# EAGLE board Display (EAGLE 8.6.2)
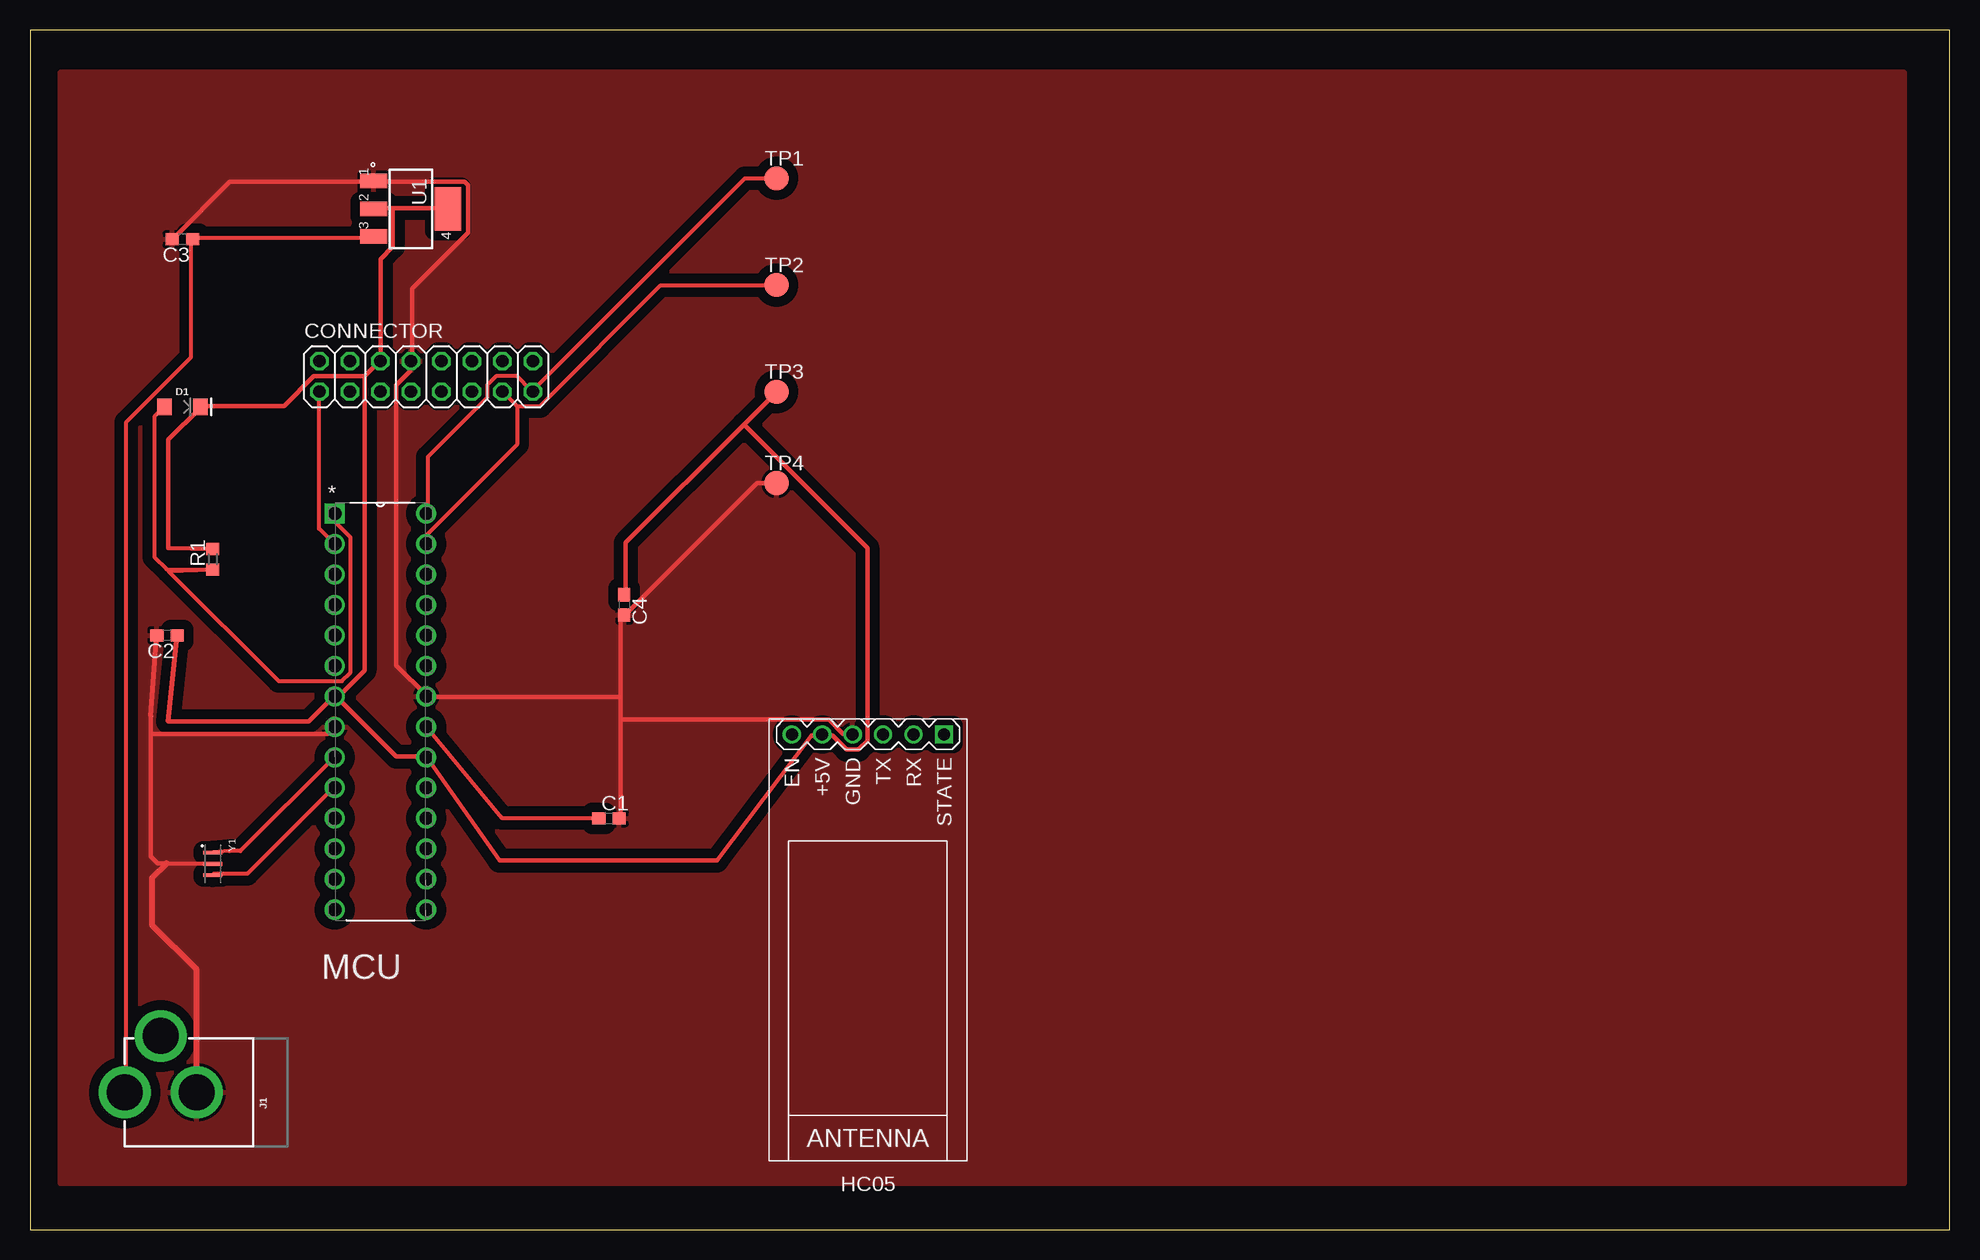
[diagram p0: board, top side]
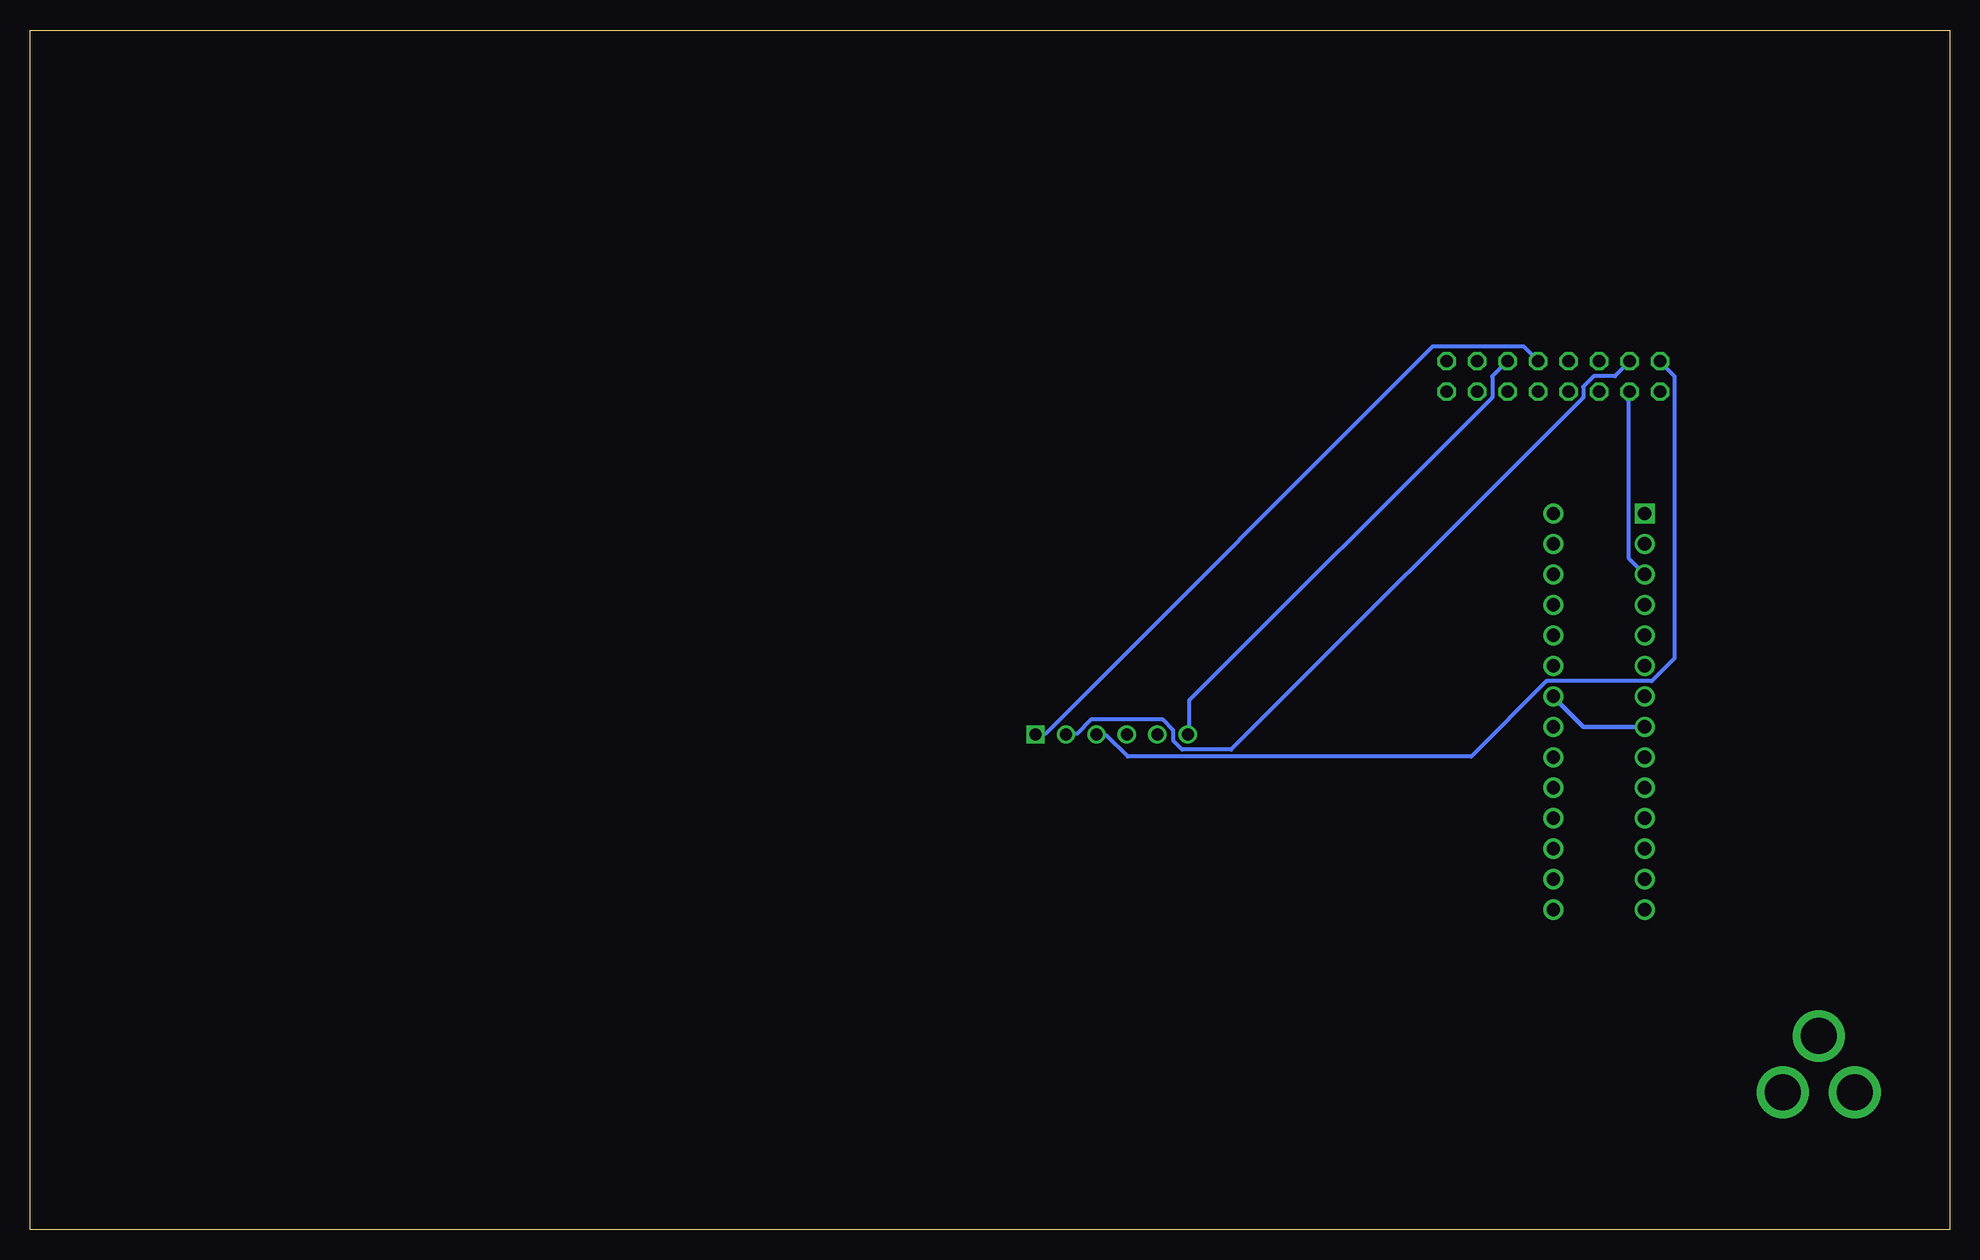
[diagram p1: board, bottom side, seen from below]

Size 160 x 100 mm. Coordinates in mm from the lower left corner, seen from the top.
Outline: 0,0 160,0 160,100 0,100 0,0
Copper layers (1*16): Top 0.035mm / dielectric 1.5mm / Bottom 0.035mm
Design rules "default": minimum track width 6mil, minimum drill 0.35mm, track to track 6mil, track to pad 6mil, pad to pad 6mil, via to via 6mil, smd to smd 6mil, copper to edge 40mil, drill to drill 6mil, minimum pad ring 10mil, minimum via ring 8mil, stop-mask expansion 4mil, vias tented up to drill 0mil, thermal gap 10mil
Net classes: 0 default: width 0.33 mm, drill 0.559 mm, clearance 0.254 mm; 1 ground: width 0.381 mm, drill 0.254 mm, clearance 0.254 mm; 2 5V: width 0.381 mm, drill 0.254 mm, clearance 0.254 mm

## Footprints (pad centres in the part's own frame; a part is rotated, then mirrored left to right if it is on the bottom)
C0603 = smd 1.1 x 1: 1 -0.85,0; 2 0.85,0
2X08 = drill 1.016 octagon: 1 -8.89,-1.27; 2 -8.89,1.27; 3 -6.35,-1.27; 4 -6.35,1.27; 5 -3.81,-1.27; 6 -3.81,1.27; 7 -1.27,-1.27; 8 -1.27,1.27; 9 1.27,-1.27; 10 1.27,1.27; 11 3.81,-1.27; 12 3.81,1.27; 13 6.35,-1.27; 14 6.35,1.27; 15 8.89,-1.27; 16 8.89,1.27
LED-1206 = smd 1.2 x 1.4: A -1.5,0; C 1.5,0
WIRELESS-BLUETOOTH-HC-05 = drill 1 square: 1 -6.35,-17.145 | drill 1: 2 -3.81,-17.145; 3 -1.27,-17.145; 4 1.27,-17.145; 5 3.81,-17.145; 6 6.35,-17.145
POWER_JACK_PTH = drill 2.997 pad 4.318: GND 0,7.7; GNDBREAK 4.7,10.7; PWR 0,13.7
DIP254P762X457-28 = drill 1.118 square: 1 -7.62,33.02 | drill 1.118: 2 -7.62,30.48; 3 -7.62,27.94; 4 -7.62,25.4; 5 -7.62,22.86; 6 -7.62,20.32; 7 -7.62,17.78; 8 -7.62,15.24; 9 -7.62,12.7; 10 -7.62,10.16; 11 -7.62,7.62; 12 -7.62,5.08; 13 -7.62,2.54; 14 -7.62,0; 15 0,0; 16 0,2.54; 17 0,5.08; 18 0,7.62; 19 0,10.16; 20 0,12.7; 21 0,15.24; 22 0,17.78; 23 0,20.32; 24 0,22.86; 25 0,25.4; 26 0,27.94; 27 0,30.48; 28 0,33.02
R0603 = smd 1 x 1.1: 1 -0.85,0; 2 0.85,0
TP20R = smd 2 x 2: TP 0,0
SOT223 = smd 2.235 x 1.219: 1 -3.099,2.311; 2 -3.099,0; 3 -3.099,-2.311 | smd 2.2 x 3.6: 4 3.099,0
OSC_CSTCE16M0V53-R0 = smd 0.3 x 1.6: 1 -0.95,0; 2 0,0; 3 0.95,0

## Placement (x,y rotation side)
C1  100nF  [C0603]  48.26,34.29 0 top
C2  100nF  [C0603]  11.43,49.53 180 top
C3  0.33uF  [C0603]  12.7,82.55 180 top
C4  0.33uF  [C0603]  49.53,52.07 270 top
CONNECTOR  [2X08]  33.02,71.12 0 top
D1  [LED-1206]  12.7,68.58 0 top
HC05  WIRELESS-BLUETOOTH-HC-05  [WIRELESS-BLUETOOTH-HC-05]  69.85,24.13 180 top
J1  POWER_JACK  [POWER_JACK_PTH]  21.59,11.43 90 top
MCU  ATMEGA328P-PU  [DIP254P762X457-28]  33.02,26.67 0 top
R1  10k  [R0603]  15.24,55.88 90 top
TP1  TPTP20R  [TP20R]  62.23,87.63 0 top
TP2  TPTP20R  [TP20R]  62.23,78.74 0 top
TP3  TPTP20R  [TP20R]  62.23,69.85 0 top
TP4  TPTP20R  [TP20R]  62.23,62.23 0 top
U1  LD1117S33CTR  [SOT223]  31.75,85.09 0 top
Y1  CSTCE16M0V53-R0  [OSC_CSTCE16M0V53-R0]  15.24,30.48 270 top

## Library data of the parts
C1-C4 = rcl; SPICEPREFIX: C
CONNECTOR = pinhead
D1 = SparkFun-LED
HC05 = diy-modules
J1 = SparkFun-Connectors; PROD_ID: CONN-08197
MCU = Atmel_By_element14_Batch_1-00; MPN: ATMEGA328P-PU; OC_FARNELL: 1715487; OC_NEWARK: 15R0268; PACKAGE: PDIP-28; SUPPLIER: Atmel
R1 = rcl; SPICEPREFIX: R
TP1-TP4 = testpad
U1 = LD1117S33CTR; AVAILABILITY: Good; DESCRIPTION: LD1117 Series 1300 mA 3.3 V Fixed Output Positive Voltage LDO Regulator- SOT-223; MF: STMicroelectronics; MP: LD1117S33CTR; PACKAGE: SOT-223 STMicroelectronics; PRICE: 0.19 USD
Y1 = CSTCE16M0V53-R0; AVAILABILITY: Good; DESCRIPTION: Ceramic Resonator 16MHz ??0.5% (Tol) ??0.3% (Stability) 15pF 40Ohm 3-Pin CSMD T/R; MF: Murata; MP: CSTCE16M0V53-R0; PACKAGE: SMD-3 Murata; PRICE: 0.29 USD

## Nets
5V [5V]: C2.1 C4.1 CONNECTOR.6 D1.C HC05.5 MCU.7 MCU.20 R1.2 TP3.TP U1.2 U1.4
GND [ground]: C1.2 C2.2 C3.2 C4.2 CONNECTOR.8 HC05.4 J1.GND MCU.8 MCU.22 TP4.TP U1.1 Y1.2
HC05_EN: CONNECTOR.12 HC05.6
HC05_STATE: CONNECTOR.10 HC05.1
HC05_UART_RXD: CONNECTOR.4 HC05.2
HC05_UART_TXD: CONNECTOR.2 HC05.3
MCU_RX: CONNECTOR.1 MCU.2
MCU_TX: CONNECTOR.3 MCU.3
N$1: MCU.9 Y1.1
N$2: C1.1 MCU.21
N$3: MCU.10 Y1.3
N$4: D1.A MCU.1 R1.1
SCL: CONNECTOR.15 MCU.28 TP1.TP
SDA: CONNECTOR.13 MCU.27 TP2.TP
VIN: C3.1 J1.PWR U1.3

## Tracks (layer width: path | path; a pad name or v marks a point on that pad's centre or on a via)
5V
  Top 0.381: 59.52,67.11 62.22,69.81 TP3.TP | 59.52,67.11 49.66,57.25 49.66,53.02 C4.1 | 59.52,67.11 69.81,56.81 69.81,40.75 69.08,40.02 68.06,40.02 66.89,41.19 66.16,41.19 HC05.5 65.87,41.19 65.14,41.19 57.25,30.76 39.14,30.76 33.15,39.29 MCU.20 33.01,39.43 30.52,39.43 25.56,44.4 MCU.7 | 11.54,42.35 23.22,42.35 25.27,44.4 MCU.7 | R1.2 11.54,56.81 11.54,65.87 14.17,68.5 D1.C 14.31,68.64 21.18,68.64 23.66,71.13 27.9,71.13 | 30.23,85.15 34.76,85.15 U1.4 | 30.23,85.15 28.77,85.15 U1.2 | 30.23,85.15 30.23,81.93 29.21,80.91 CONNECTOR.6 29.06,72.3 27.9,71.13 | 27.9,71.13 27.9,46.59 25.7,44.4 MCU.7
  Top 0.406: 11.54,42.35 C2.1
GND
  Top 0.381: 49.22,44.4 49.22,50.83 49.51,51.12 C4.2 49.66,51.26 60.61,62.22 62.22,62.22 TP4.TP | 49.22,44.4 49.22,42.5 | 49.22,42.5 49.22,34.32 C1.2 | 49.22,42.5 66.6,42.5 67.77,41.33 68.5,41.33 HC05.4 | C3.2 11.98,82.66 16.65,87.34 28.63,87.34 U1.1 28.77,87.34 36.22,87.34 36.51,87.05 36.51,83.1 31.84,78.43 31.84,72.44 CONNECTOR.8 31.69,72.3 31.69,71.56 30.52,70.4 30.52,47.03 33.01,44.55 MCU.22 33.15,44.4 49.22,44.4 | 10.08,41.33 10.08,31.11 10.66,30.52 11.39,30.52 Y1.2 | 10.08,41.33 10.08,42.79 | 10.08,41.33 24.83,41.33 25.27,41.77 MCU.8
  Top 0.406: 10.08,42.79 C2.2
  Top 0.508: J1.GND 13.89,21.67 10.16,25.4 10.16,29.29 11.39,30.52
  Bottom 0.381: MCU.8 25.41,41.92 30.52,41.92 33.01,44.4 MCU.22
  pour Top (isolate 0.813): 3.81,96.52 156.21,96.52 156.21,3.81 3.81,3.81 2.54,3.81 2.54,96.52
HC05_EN
  Bottom 0.33: HC05.6 63.39,41.33 63.39,44.11 38.12,69.37 38.12,71.13 36.95,72.3 CONNECTOR.12
HC05_STATE
  Bottom 0.33: HC05.1 76.09,41.33 75.36,41.33 43.09,73.61 35.49,73.61 34.32,72.44 CONNECTOR.10
HC05_UART_RXD
  Bottom 0.33: HC05.2 73.61,41.33 72.73,41.33 71.56,42.5 65.58,42.5 64.7,41.62 64.7,40.75 63.97,40.02 59.88,40.02 30.52,69.37 30.52,70.25 29.65,71.13 27.9,71.13 26.73,72.3 CONNECTOR.4
HC05_UART_TXD
  Bottom 0.33: HC05.3 70.98,41.19 70.25,41.19 68.5,39.43 39.87,39.43 33.59,45.71 24.83,45.71 22.93,47.61 22.93,71.13 24.1,72.3 CONNECTOR.2
MCU_RX
  Top 0.33: CONNECTOR.1 24.1,69.81 24.1,58.42 25.27,57.25 MCU.2
MCU_TX
  Bottom 0.33: MCU.3 26.73,55.94 26.73,69.81 CONNECTOR.3
N$1
  Top 0.33: Y1.1 16.62,31.55 17.53,31.55 25.27,39.29 MCU.9
N$2
  Top 0.33: C1.1 47.32,34.32 39.33,34.32 33.15,41.77 MCU.21
N$3
  Top 0.33: Y1.3 15.35,29.65 18.11,29.65 25.27,36.8 MCU.10
N$4
  Top 0.33: D1.A 11.1,68.5 10.37,67.77 10.37,56.08 11.39,55.06 R1.1 11.54,54.91 20.74,45.71 26,45.71 26.73,46.44 26.73,57.69 25.41,59 25.41,59.59 MCU.1
SCL
  Top 0.33: TP1.TP 59.59,87.63 41.92,69.96 CONNECTOR.15 41.77,69.96 40.6,71.13 38.85,71.13 38.12,70.4 38.12,69.37 33.15,64.41 33.15,59.73 MCU.28
SDA
  Top 0.33: 40.6,68.64 42.5,68.64 52.58,78.72 62.22,78.72 TP2.TP | 40.6,68.64 39.43,69.81 CONNECTOR.13 | 40.6,68.64 40.6,65.43 33.15,57.98 33.15,57.25 MCU.27
VIN
  Top 0.33: U1.3 28.63,82.66 13.58,82.66 C3.1 13.44,82.52 13.44,72.73 8.03,67.33 8.03,11.54 J1.PWR